# EAGLE board untitled.job (EAGLE 6.0)
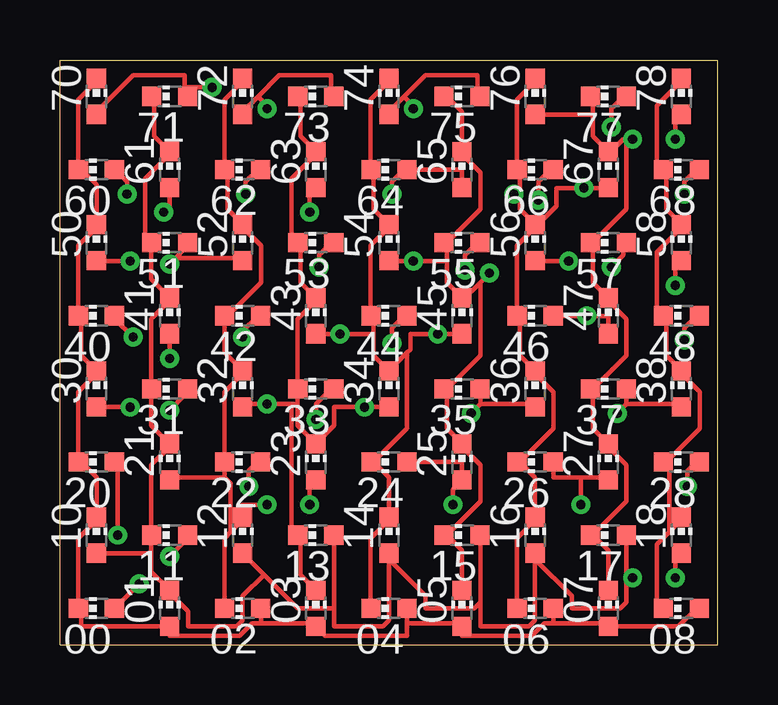
[diagram p0: board, top side]
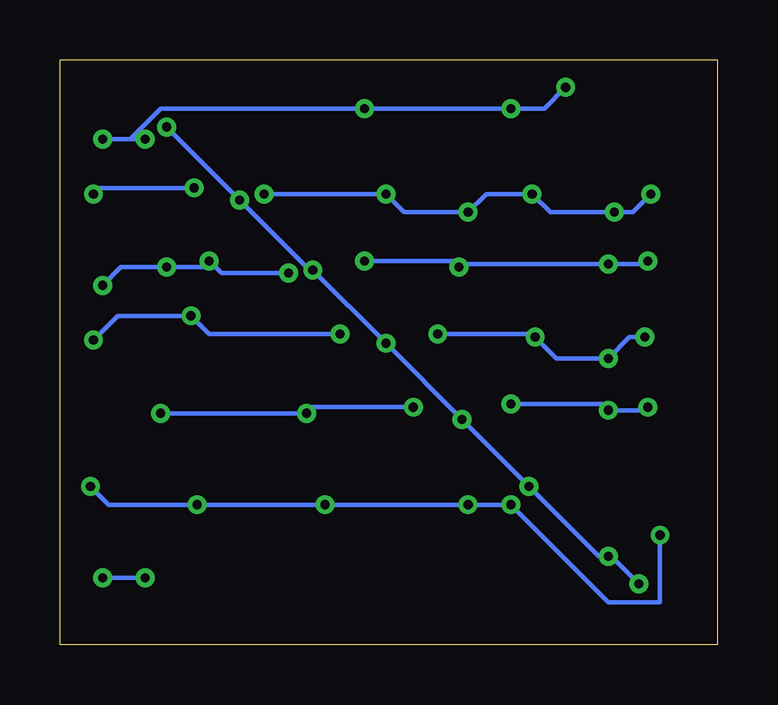
[diagram p1: board, bottom side, seen from below]

Size 27.43 x 24.38 mm. Coordinates in mm from the lower left corner, seen from the top.
Outline: 0,0 0,24.38 27.43,24.38 27.43,0 0,0
Copper layers (1*16): Top 0.035mm / dielectric 1.5mm / Bottom 0.035mm
Design rules: minimum track width 7mil, minimum drill 15mil, track to track 7mil, track to pad 7mil, pad to pad 7mil, via to via 7mil, smd to smd 7mil, copper to edge 0mil, drill to drill 7mil, minimum pad ring 10mil, minimum via ring 8mil, stop-mask expansion 4mil, vias tented up to drill 0mil, thermal gap 10mil

## Footprints (pad centres in the part's own frame; a part is rotated, then mirrored left to right if it is on the bottom)
CHIP-LED0603 = smd 0.8 x 0.8: A 0,-0.75; C 0,0.75

## Placement (x,y rotation side)
00  [CHIP-LED0603]  1.52,1.52 90 top
01  [CHIP-LED0603]  4.57,1.52 0 top
02  [CHIP-LED0603]  7.62,1.52 90 top
03  [CHIP-LED0603]  10.67,1.52 0 top
04  [CHIP-LED0603]  13.72,1.52 90 top
05  [CHIP-LED0603]  16.76,1.52 0 top
06  [CHIP-LED0603]  19.81,1.52 90 top
07  [CHIP-LED0603]  22.86,1.52 0 top
08  [CHIP-LED0603]  25.91,1.52 90 top
10  [CHIP-LED0603]  1.52,4.57 0 top
11  [CHIP-LED0603]  4.57,4.57 90 top
12  [CHIP-LED0603]  7.62,4.57 0 top
13  [CHIP-LED0603]  10.67,4.57 90 top
14  [CHIP-LED0603]  13.72,4.57 0 top
15  [CHIP-LED0603]  16.76,4.57 90 top
16  [CHIP-LED0603]  19.81,4.57 0 top
17  [CHIP-LED0603]  22.86,4.57 90 top
18  [CHIP-LED0603]  25.91,4.57 0 top
20  [CHIP-LED0603]  1.52,7.62 90 top
21  [CHIP-LED0603]  4.57,7.62 0 top
22  [CHIP-LED0603]  7.62,7.62 90 top
23  [CHIP-LED0603]  10.67,7.62 0 top
24  [CHIP-LED0603]  13.72,7.62 90 top
25  [CHIP-LED0603]  16.76,7.62 0 top
26  [CHIP-LED0603]  19.81,7.62 90 top
27  [CHIP-LED0603]  22.86,7.62 0 top
28  [CHIP-LED0603]  25.91,7.62 90 top
30  [CHIP-LED0603]  1.52,10.67 0 top
31  [CHIP-LED0603]  4.57,10.67 90 top
32  [CHIP-LED0603]  7.62,10.67 0 top
33  [CHIP-LED0603]  10.67,10.67 90 top
34  [CHIP-LED0603]  13.72,10.67 0 top
35  [CHIP-LED0603]  16.76,10.67 90 top
36  [CHIP-LED0603]  19.81,10.67 0 top
37  [CHIP-LED0603]  22.86,10.67 90 top
38  [CHIP-LED0603]  25.91,10.67 0 top
40  [CHIP-LED0603]  1.52,13.72 90 top
41  [CHIP-LED0603]  4.57,13.72 0 top
42  [CHIP-LED0603]  7.62,13.72 90 top
43  [CHIP-LED0603]  10.67,13.72 0 top
44  [CHIP-LED0603]  13.72,13.72 90 top
45  [CHIP-LED0603]  16.76,13.72 0 top
46  [CHIP-LED0603]  19.81,13.72 90 top
47  [CHIP-LED0603]  22.86,13.72 0 top
48  [CHIP-LED0603]  25.91,13.72 90 top
50  [CHIP-LED0603]  1.52,16.76 0 top
51  [CHIP-LED0603]  4.57,16.76 90 top
52  [CHIP-LED0603]  7.62,16.76 0 top
53  [CHIP-LED0603]  10.67,16.76 90 top
54  [CHIP-LED0603]  13.72,16.76 0 top
55  [CHIP-LED0603]  16.76,16.76 90 top
56  [CHIP-LED0603]  19.81,16.76 0 top
57  [CHIP-LED0603]  22.86,16.76 90 top
58  [CHIP-LED0603]  25.91,16.76 0 top
60  [CHIP-LED0603]  1.52,19.81 90 top
61  [CHIP-LED0603]  4.57,19.81 0 top
62  [CHIP-LED0603]  7.62,19.81 90 top
63  [CHIP-LED0603]  10.67,19.81 0 top
64  [CHIP-LED0603]  13.72,19.81 90 top
65  [CHIP-LED0603]  16.76,19.81 0 top
66  [CHIP-LED0603]  19.81,19.81 90 top
67  [CHIP-LED0603]  22.86,19.81 0 top
68  [CHIP-LED0603]  25.91,19.81 90 top
70  [CHIP-LED0603]  1.52,22.86 0 top
71  [CHIP-LED0603]  4.57,22.86 90 top
72  [CHIP-LED0603]  7.62,22.86 0 top
73  [CHIP-LED0603]  10.67,22.86 90 top
74  [CHIP-LED0603]  13.72,22.86 0 top
75  [CHIP-LED0603]  16.76,22.86 90 top
76  [CHIP-LED0603]  19.81,22.86 0 top
77  [CHIP-LED0603]  22.86,22.86 90 top
78  [CHIP-LED0603]  25.91,22.86 0 top

## Library data of the parts
00 01-08 10-18 20-28 30-38 40-48 50-58 60-68 70-78 = led

## Nets
D: 00.A 11.A 22.A 33.A 44.A 55.A 66.A 77.A
S0: 00.C 01.A 02.A 03.A 04.A 05.A 06.A 07.A 08.A 10.C 20.C 30.C 40.C 50.C 60.C 70.C
S1: 01.C 10.A 11.C 12.A 13.A 14.A 15.A 16.A 17.A 18.A 21.C 31.C 41.C 51.C 61.C 71.C
S2: 02.C 12.C 20.A 21.A 22.C 23.A 24.A 25.A 26.A 27.A 28.A 32.C 42.C 52.C 62.C 72.C
S3: 03.C 13.C 23.C 30.A 31.A 32.A 33.C 34.A 35.A 36.A 37.A 38.A 43.C 53.C 63.C 73.C
S4: 04.C 14.C 24.C 34.C 40.A 41.A 42.A 43.A 44.C 45.A 46.A 47.A 48.A 54.C 64.C 74.C
S5: 05.C 15.C 25.C 35.C 45.C 50.A 51.A 52.A 53.A 54.A 55.C 56.A 57.A 58.A 65.C 75.C
S6: 06.C 16.C 26.C 36.C 46.C 56.C 60.A 61.A 62.A 63.A 64.A 65.A 66.C 67.A 68.A 76.C
S7: 07.C 17.C 27.C 37.C 47.C 57.C 67.C 70.A 71.A 72.A 73.A 74.A 75.A 76.A 77.C 78.A
S8: 08.C 18.C 28.C 38.C 48.C 58.C 68.C 78.C

## Tracks (layer width: path | path; a pad name or v marks a point on that pad's centre or on a via)
D  (via drill 0.38)
  Top 0.178: v3.3,2.54 2.29,1.52 00.A | v4.57,3.68 5.21,4.32 5.21,4.57 11.A | v7.87,6.6 7.87,7.24 8.26,7.62 22.A | v10.67,9.4 10.67,10.03 11.3,10.67 33.A | v13.84,12.57 13.84,13.21 14.35,13.72 44.A | v16.89,15.62 16.89,16.26 17.4,16.76 55.A | v19.94,18.54 19.94,19.3 20.45,19.81 66.A | v22.99,21.59 22.99,22.35 23.5,22.86 77.A
  Bottom 0.178: v3.3,2.54 4.45,3.68 v4.57,3.68 4.95,3.68 v7.87,6.6 v10.67,9.4 v13.84,12.57 v16.89,15.62 17.02,15.62 v19.94,18.54 v22.99,21.59
S0
  Top 0.178: 20.57,0.89 22.86,0.89 07.A 25.78,0.76 26.54,1.52 08.A | 20.57,0.89 20.57,1.52 06.A | 8.38,0.89 10.67,0.89 03.A 11.05,0.38 14.48,0.38 14.48,0.89 | 8.38,0.89 8.38,1.52 02.A | 14.48,0.89 16.76,0.89 05.A 16.76,0.38 19.68,0.38 20.19,0.89 20.57,0.89 | 14.48,0.89 04.A | 70.C 1.52,23.5 0.76,22.73 60.C 0.89,19.81 1.52,19.18 50.C 1.52,17.4 0.76,16.64 40.C 0.89,13.72 0.89,12.06 30.C 1.52,11.3 0.76,10.54 20.C 0.89,7.62 1.52,6.99 10.C 1.52,5.21 0.76,4.45 00.C 0.89,1.52 0.89,0.76 01.A | 8.38,0.89 8,0.89 7.49,0.38 4.57,0.38 01.A | 01.A
S1  (via drill 0.38)
  Top 0.178: 8.51,2.92 9.91,1.52 11.43,1.52 | 8.51,2.92 12.A | 11.43,1.52 13.A | 13.72,3.56 13.72,1.02 13.46,0.76 11.43,0.76 11.43,1.52 | 13.72,3.56 14.A | 17.53,1.78 17.53,4.57 15.A | 17.53,1.78 17.27,1.52 15.24,1.52 15.24,2.03 13.72,3.56 | 19.81,3.56 19.81,1.02 19.56,0.76 17.53,0.76 17.53,1.78 | 19.81,3.56 16.A | 23.62,2.79 23.62,1.78 23.37,1.52 21.34,1.52 21.34,2.03 19.81,3.56 | 23.62,2.79 23.62,4.57 17.A | v25.65,2.79 25.65,3.56 18.A | 23.62,2.79 v23.88,2.79 | 71.C 3.94,22.86 3.94,21.21 4.57,20.57 61.C 4.57,20.45 3.56,19.43 3.56,17.02 51.C | 51.C 3.81,15.24 41.C 4.57,14.35 3.81,13.59 31.C | 31.C 3.81,9.14 4.57,8.38 21.C 4.57,8.26 3.81,7.49 11.C | 3.81,3.81 10.A | 11.C 3.81,3.81 | 3.81,3.81 3.81,3.05 4.57,2.29 01.C 4.57,2.16 5.33,1.4 5.33,0.76 7.37,0.76 7.62,1.02 7.62,2.03 8.51,2.92 | 11.C | 31.C | 51.C
  Bottom 0.178: v23.88,2.79 v25.65,2.79
S2  (via drill 0.38)
  Top 0.178: 72.C 7.62,23.5 6.86,22.73 6.86,19.81 62.C 6.99,19.81 6.99,18.16 7.62,17.53 52.C 7.62,17.4 8.38,16.64 8.38,15.11 6.99,13.72 42.C 6.86,13.72 6.86,12.19 32.C 7.62,11.3 6.86,10.54 6.86,7.62 | 21.72,6.99 20.57,6.99 20.57,7.62 26.A | 21.72,6.99 22.86,6.99 27.A | 24.A 16.76,7.62 25.A 16.76,6.86 16.38,6.48 v16.38,5.84 | 6.86,6.99 4.57,6.99 21.A | 6.86,7.62 6.86,6.99 | 7.11,4.7 7.62,5.21 12.C 7.62,5.84 v8.64,5.84 | 7.11,4.7 6.86,4.45 6.86,1.52 02.C | v10.41,5.84 10.41,6.6 10.67,6.86 23.A | v2.41,4.57 2.41,7.49 2.29,7.62 20.A | v26.16,6.6 26.16,7.24 26.54,7.62 28.A | 6.86,6.99 7.11,6.73 7.11,4.7 | v21.72,5.84 21.72,6.99 | 6.86,7.62 22.C
  Bottom 0.178: v2.41,4.57 2.41,1.78 4.57,1.78 v8.64,5.84 v10.41,5.84 v16.38,5.84 v21.72,5.84 25.4,5.84 v26.16,6.6
S3  (via drill 0.38)
  Top 0.178: v2.92,9.91 1.52,9.91 30.A | v4.57,9.78 5.21,10.41 5.21,10.67 31.A | 73.C 10.03,22.86 10.03,21.21 10.67,20.57 63.C 10.67,20.45 9.65,19.43 9.65,17.02 9.91,16.76 53.C 10.03,16.76 10.03,15.11 43.C 10.67,14.35 9.91,13.59 9.91,10.67 | 23.62,10.03 25.91,10.03 38.A | 23.62,10.03 23.62,10.67 37.A | 17.53,10.03 19.81,10.03 36.A | 17.53,10.03 17.53,10.67 35.A | 03.C 10.67,2.29 10.03,2.92 10.03,4.57 13.C 9.91,4.57 9.65,4.83 9.65,10.03 | 9.91,10.03 9.65,10.03 | 9.65,10.03 v8.64,10.03 7.62,10.03 32.A | 9.91,10.67 9.91,10.03 | 10.67,8.38 9.91,9.14 9.91,10.03 | 10.67,8.38 11.43,9.14 11.43,9.91 v12.7,9.91 13.72,9.91 34.A | 10.67,8.38 23.C | v17.14,9.65 17.53,10.03 | v23.24,9.65 23.62,10.03 | 9.91,10.67 33.C
  Bottom 0.178: v2.92,9.91 3.05,9.78 v4.57,9.78 4.83,10.03 v8.64,10.03 | v12.7,9.91 16.89,9.91 v17.14,9.65 v23.24,9.65
S4  (via drill 0.38)
  Top 0.178: v4.57,11.94 41.A | v3.05,12.83 2.29,13.59 2.29,13.72 40.A | v7.62,12.83 7.62,13.08 8.26,13.72 42.A | 46.A v21.97,13.72 22.86,13.72 47.A | v26.04,12.7 26.04,13.21 26.54,13.72 48.A | 74.C 13.72,23.5 12.95,22.73 12.95,19.81 64.C 13.08,19.81 13.08,18.16 13.72,17.53 54.C 13.72,17.4 12.95,16.64 12.95,13.72 44.C 13.08,13.72 13.08,12.95 | 04.C 12.95,1.52 12.95,4.45 13.72,5.21 14.C 13.72,6.99 13.08,7.62 | 34.C 13.08,12.06 13.08,12.95 | 13.08,12.95 v11.68,12.95 10.67,12.95 43.A | 34.C 14.48,12.19 | 14.48,12.19 14.61,12.32 14.61,12.95 v15.75,12.95 16.76,12.95 45.A | 34.C | 13.08,7.62 14.48,9.02 14.48,12.19 | 13.08,7.62 24.C
  Bottom 0.178: v3.05,12.83 3.68,12.83 v4.57,11.94 6.73,11.94 v7.62,12.83 7.75,12.95 v11.68,12.95 | v26.04,12.7 25.02,13.72 v21.97,13.72 21.21,12.95 v15.75,12.95
S5  (via drill 0.38)
  Top 0.178: v2.92,16 50.A | 4.83,16.13 5.21,16.51 5.21,16.76 51.A | 4.83,16.13 7.62,16.13 52.A | 4.83,16.13 v4.57,15.88 | v10.79,15.75 10.79,16.26 11.3,16.76 53.A | 16.13,4.57 16.76,3.94 05.C | 16.13,10.67 16.13,9.02 16.76,8.38 25.C 16.76,8.26 17.53,7.49 17.53,5.97 16.13,4.57 | 16.13,4.57 15.C | v21.21,16 56.A | v22.99,15.75 23.5,16.26 23.5,16.76 57.A | v25.65,14.99 25.65,15.75 58.A | 75.C 16.13,22.86 16.76,22.23 65.C 16.76,20.45 17.53,19.68 17.53,18.16 16.13,16.76 | 16.13,16.76 16.13,16 | 16.13,16 16.13,15.11 45.C 16.76,14.35 17.53,15.11 | 16.13,16 v14.73,16 54.A | 16.13,16.76 55.C | 17.53,15.11 v17.91,15.49 | 16.13,10.67 17.53,12.06 17.53,15.11 | 16.13,10.67 35.C
  Bottom 0.178: v2.92,16 3.05,15.88 v4.57,15.88 10.67,15.88 v10.79,15.75 11.05,16 v14.73,16 | v25.65,14.99 24.89,15.75 v22.99,15.75 21.46,15.75 v21.21,16 20.7,15.49 v17.91,15.49
S6  (via drill 0.38)
  Top 0.178: 65.A 16.76,19.81 64.A 14.35,19.81 13.84,19.3 v13.84,18.8 | v2.79,18.8 2.79,19.3 2.29,19.81 60.A | v4.32,18.03 4.57,18.29 61.A | v7.75,18.8 7.75,19.3 8.26,19.81 62.A | v10.41,18.03 10.41,18.8 63.A | 06.C 19.05,4.45 19.81,5.21 16.C 19.81,6.99 19.18,7.62 | 19.18,18.8 19.18,19.81 66.C 19.05,22.73 19.81,23.5 76.C | 19.18,18.8 19.18,18.16 19.81,17.53 56.C 19.81,17.4 | 19.81,17.4 20.7,18.29 20.7,19.05 v21.84,19.05 67.A | v26.04,18.8 26.04,19.3 26.54,19.81 68.A | 19.81,17.4 19.05,16.64 46.C 19.18,13.72 19.18,12.06 36.C 19.81,11.3 20.57,10.54 20.57,9.02 19.18,7.62 | 19.18,7.62 26.C | 19.18,18.8 v18.92,18.8
  Bottom 0.178: v2.79,18.8 3.56,18.03 v4.32,18.03 6.99,18.03 v7.75,18.8 9.65,18.8 v10.41,18.03 13.08,18.03 v13.84,18.8 v18.92,18.8 | v26.04,18.8 25.78,19.05 v21.84,19.05
S7  (via drill 0.38)
  Top 0.178: 22.23,4.57 22.86,3.94 07.C | 22.23,10.67 22.23,9.02 22.86,8.38 27.C 22.86,8.26 23.62,7.49 23.62,5.97 22.23,4.57 | 22.23,4.57 17.C | 14.35,22.86 15.24,23.75 17.4,23.75 17.4,22.86 75.A | 14.35,22.86 13.72,22.23 74.A | 8.26,22.86 9.14,23.75 11.3,23.75 11.3,22.86 73.A | 8.26,22.86 7.62,22.23 72.A | 5.21,23.24 5.21,22.86 71.A 5.21,23.24 | 5.21,23.24 5.21,23.75 3.05,23.75 1.52,22.23 70.A | 22.23,16.76 22.23,15.11 47.C 22.86,14.35 23.62,13.59 23.62,12.06 22.23,10.67 | 22.23,22.1 22.23,22.86 77.C | 22.23,22.1 22.23,21.21 22.86,20.57 67.C 22.86,20.45 23.5,21.08 23.62,21.08 | 22.23,22.1 19.81,22.1 76.A | v25.65,21.08 25.65,21.84 25.91,22.1 78.A | 22.23,16.76 23.62,18.16 23.62,21.08 | 22.23,16.76 57.C | 23.62,21.08 v23.88,21.08 | v6.35,23.24 5.21,23.24 | 8.26,22.86 8.64,22.48 v8.64,22.35 | 14.35,22.86 14.73,22.48 v14.73,22.35 | 22.23,10.67 37.C
  Bottom 0.178: v23.88,21.08 24.51,21.08 | 24.51,21.08 v25.65,21.08 | v6.35,23.24 7.24,22.35 v8.64,22.35 v14.73,22.35 23.24,22.35 24.51,21.08
S8
  Top 0.178: 25.4,4.7 25.91,5.21 18.C | 25.4,4.7 24.89,4.19 24.89,1.78 25.15,1.52 08.C | 25.27,7.62 25.4,7.49 25.4,4.7 | 78.C 25.91,23.5 24.89,22.48 24.89,20.07 25.15,19.81 68.C 25.27,19.81 25.27,18.16 25.91,17.53 58.C 25.91,17.4 24.89,16.38 24.89,13.97 25.15,13.72 48.C 25.27,13.72 25.27,12.06 38.C 25.91,11.3 26.67,10.54 26.67,9.02 25.27,7.62 | 25.27,7.62 28.C